# Altium PCB УШЯИ.467444.130.PcbDoc (part 3 of 4)
Units mm, origin at the board's own origin, x right, y up, seen from the top; angles counter-clockwise.
Board outline 280 x 190 mm, 6 copper layers (Top, GND, INT1, INT2, POWER, Bottom), stack 1.422 mm thick; 223 components, 176 nets, 1081 pads, 326 vias.
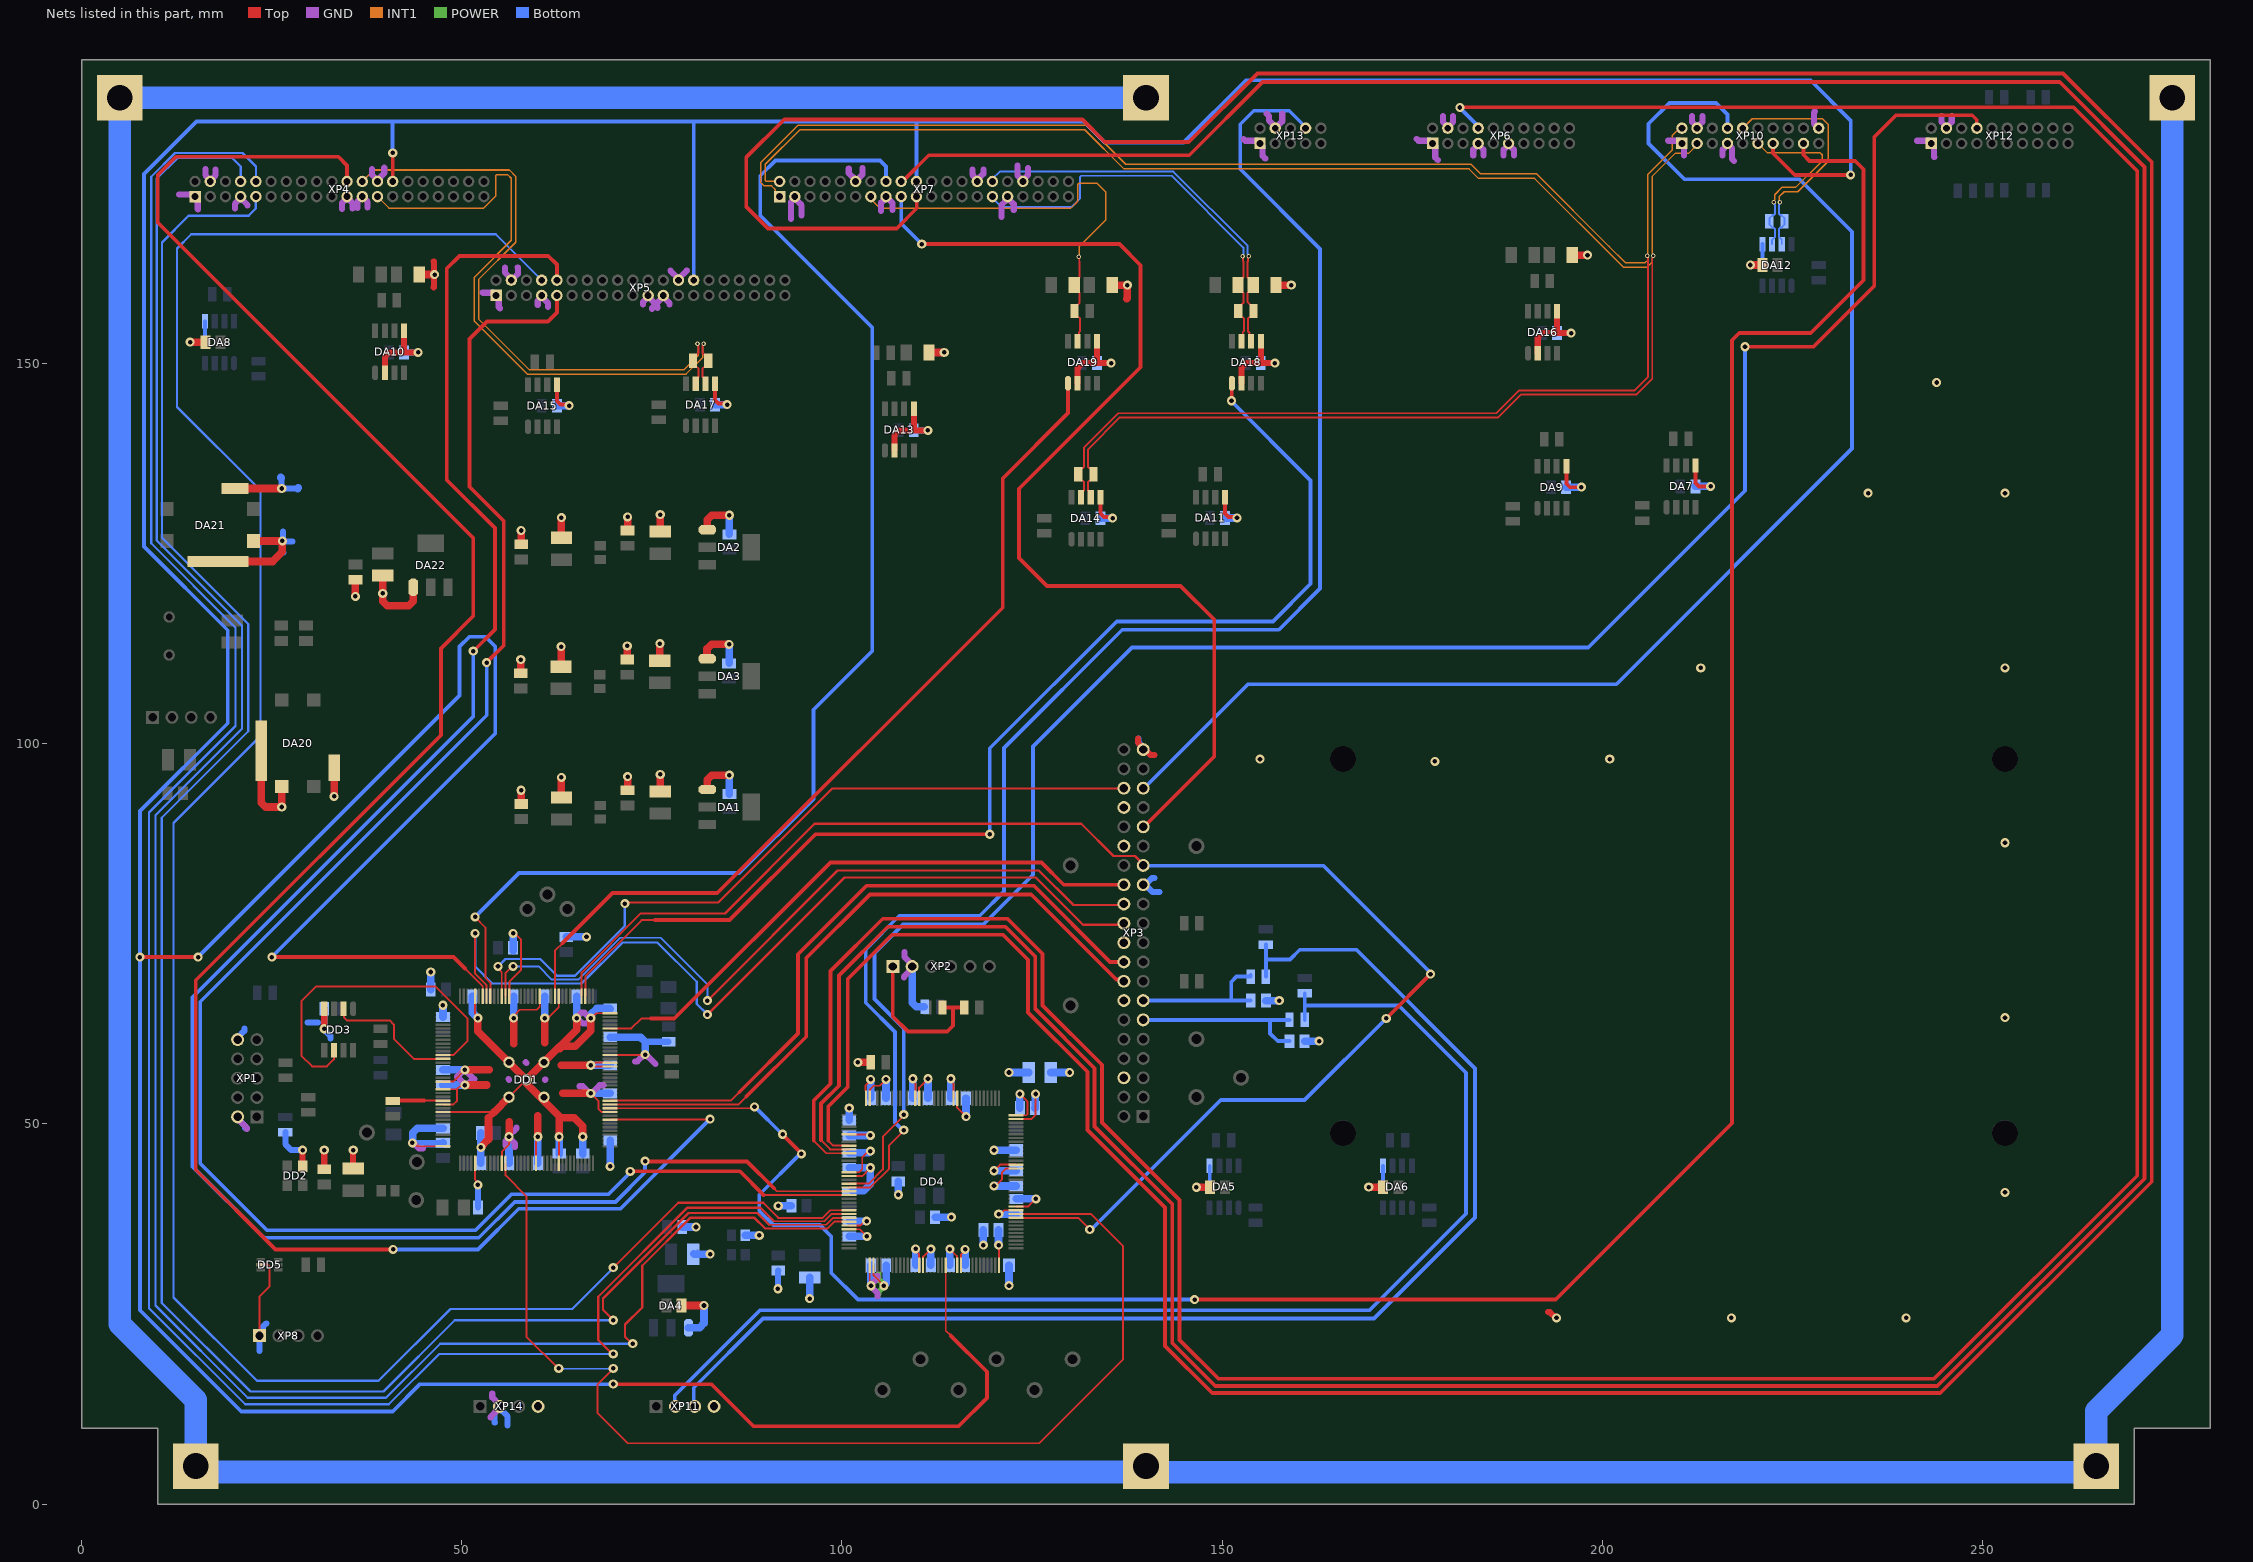
[diagram p7: the nets of this part, all layers, seen from the top]

## Via types
v1: diameter 1.2, hole 0.6, Top to Bottom, tented both sides, 284 vias
v2: diameter 0.6, hole 0.3, Top to Bottom, tented both sides, 42 vias

## Nets (pads, with @x,y where several pads share a name; then routed paths per layer and width w, separated by ;. In a path a pad name is that pad's centre, name@x,y a point inside that pad or via, vN(x,y) a via of type N, cw(c..) or ccw(c..) an arc to the next point about the centre after c; other vN are vias at no path point) (continued)
DAT_ADC4: DA18.1 DD1.111 | length 156.9
  Top w0.25: DD1.111@66.25,66.813 66.25,69.425 73.65,76.825 75.419,76.825
  Top w0.5: 75.419,76.825 85.2,76.825 96.5,88.125 v1(119.45,88.125) ; v1(151.25,145.15) 151.272,145.173 151.272,147.427 DA18.1@151.295,147.45
  Bottom w0.5: v1(119.45,88.125) 119.45,99.425 136.15,116.125 156.7,116.125 161.65,121.075 161.65,134.65 v1@151.029,145.271
DAT_ADC4_n: DA18.7 R43.2 R44.1 XP7.29 | length 54.8
  Top w0.25: DA18.7@152.565,152.95 152.725,153.11 152.725,154.16 152.875,154.31 152.875,155.979 152.729,156.125 152.575,156.125 152.15,156.55 R44.1@152.15,156.95 152.15,157.35 152.825,158.025 152.825,158.525 152.825,159.325 152.1,160.05 R43.2@152.1,160.35 152.1,160.65 152.825,161.375 152.825,161.987 152.825,163.45 152.767,163.508 152.767,164.083 v2(152.7,164.15)
  Bottom w0.25: XP7.29@119.8,172 119.8,171.825 120.975,170.65 130.2,170.65 131.325,171.775 131.325,174.604 131.471,174.75 143.372,174.75 152.825,165.297 152.825,164.471 152.767,164.413 152.767,164.217 v2(152.7,164.15)
DAT_ADC4_p: DA18.6 R44.2 R48.1 XP7.30 | length 52.5
  Top w0.25: v2(153.5,164.15) 153.433,164.083 153.433,163.508 153.375,163.45 153.375,162.215 153.375,161.375 154.1,160.65 R48.1@154.1,160.35 154.1,160.05 153.375,159.325 153.375,158.753 153.375,158.125 154.15,157.35 R44.2@154.15,156.95 154.15,156.55 153.725,156.125 153.571,156.125 153.425,155.979 153.425,154.538 153.425,154.275 153.602,154.098 153.602,153.183 DA18.6@153.835,152.95
  Bottom w0.25: XP7.30@119.8,174 119.8,174.325 120.775,175.3 128.208,175.3 143.6,175.3 153.375,165.525 153.375,164.471 153.433,164.413 153.433,164.217 v2(153.5,164.15)
DAT_DDAC_n: DA14.7 R39.1 XP7.1 XP10.2 | length 253.4
  Top w0.25: DA14.7@131.465,132.45 131.465,133 131.825,133.36 131.825,133.9 131.825,134.479 131.679,134.625 131.525,134.625 131.1,135.05 R39.1@131.1,135.45 131.1,135.85 131.525,136.275 131.679,136.275 131.825,136.421 131.825,138.978 136.347,143.5 186.1,143.5 189.1,146.5 204.272,146.5 206.05,148.278 206.05,163.904 205.992,163.962 205.992,164.158 v2(205.925,164.225)
  INT1 w0.2: XP7.1@91.8,172 91.217,172.583 91.217,172.933 90.75,173.4 89.794,173.4 89.325,173.869 89.325,176.5 89.676,176.851 93.874,181.049 94.225,181.4 132.193,181.4 137.343,176.25 182.753,176.25 184.003,175 191.375,175 191.551,174.824 200.926,165.449 203.075,163.3 205.651,163.3 206.025,163.674 206.025,163.908 206.002,163.931 206.002,164.148 v2(205.925,164.225) 206.002,164.302 206.002,164.519 206.025,164.542 206.025,174.949 209.225,178.149 209.225,180.025 210.2,181 XP10.2@210.5,181
DAT_DDAC_p: DA14.6 R39.2 XP7.2 XP10.3 | length 251.1
  Top w0.25: DA14.6@132.735,132.45 132.735,133 132.375,133.36 132.375,134.127 132.375,134.479 132.521,134.625 132.675,134.625 133.1,135.05 R39.2@133.1,135.45 133.1,135.85 132.675,136.275 132.521,136.275 132.375,136.421 132.375,138.75 136.575,142.95 186.328,142.95 189.328,145.95 204.5,145.95 206.6,148.05 206.6,163.904 206.658,163.962 206.658,164.158 v2(206.725,164.225)
  INT1 w0.2: XP7.2@91.8,174 90.042,174 89.925,174.117 89.925,176.251 94.474,180.8 131.944,180.8 137.094,175.65 182.504,175.65 183.754,174.4 191.126,174.4 202.826,162.7 205.9,162.7 206.625,163.425 206.625,163.908 206.648,163.931 206.648,164.148 v2(206.725,164.225) 206.648,164.302 206.648,164.519 206.625,164.542 206.625,174.701 209.599,177.675 211.35,177.675 212.5,178.825 XP10.3@212.5,179
DAT_F0: DD1.84 XP3.16 | length 89.8
  Top w0.25: DD1.84@69.488,52.575 86.4,52.575 87.4,53.575
  Top w0.5: 87.4,53.575 95.3,61.475 95.3,71.825 103.675,80.2 124.9,80.2 136.092,69.008 136.86,69.008 XP3.16@137.09,68.778
DAT_F1: DD1.85 XP3.18 | length 89.6
  Top w0.25: DD1.85@69.488,53.075 85.375,53.075 86.484,54.184
  Top w0.5: 86.484,54.184 94.2,61.9 94.2,72.325 103.225,81.35 125.25,81.35 135.282,71.318 XP3.18@137.09,71.318
DAT_F2: DD1.137 XP3.22 | length 117.6
  Top w0.25: v1@51.75,75.247 v1(51.75,75.075) 51.75,69.775 53.25,68.275 DD1.137@53.25,66.813
  Top w0.3: v1(82.3,64.4) 100.325,82.425 125.5,82.425 131.7,76.225 XP3.22@137.09,76.225
  Bottom w0.3: v1(51.75,75.075) 51.75,70.704 53.979,68.475 65.75,68.475 71.156,73.881 75.719,73.881 80.9,68.7 80.9,65.8 v1(82.3,64.4)
DAT_F3: DD1.132 XP3.24 | length 101.6
  Top w0.25: DD1.132@55.75,66.813 55.75,69.875 56.6,70.725 v1(56.75,70.725)
  Top w0.3: v1(82.3,66.225) 99.425,83.35 125.9,83.35 130.45,78.8 XP3.24@137.275,78.8
  Bottom w0.25: v1(56.75,70.725) 60.084,70.725 61.809,69 65.337,69 70.837,74.5 76.181,74.5 82.3,68.381 v1(82.3,66.225)
DAT_RG: DD1.49 DD4.82 | length 149
  Top w0.25: DD1.49@55.75,44.837 55.75,43.25 58.5,40.5 58.5,22.025 62.675,17.85 v1(62.75,17.85) ; v1@69.647,17.547 67.825,15.725 67.825,12.025 71.85,8 125.944,8 137,19.056 137,33.932 132.782,38.15 DD4.82@122.9,38.15
  Bottom w0.25: 63.35,17.8 v1@69.963,17.8
  other v1: 69.914,17.85
DATAO: DD1.13 DD3.2 | length 17.5
  Top w0.25: DD3.2@34.435,65.175 34.499,65.111 34.499,63.996 34.87,63.625 40.5,63.625 41.05,63.075 41.05,61.225 43.7,58.575 45.95,58.575 DD1.13@47.512,58.575
DCLK: DD1.12 DD3.6 | length 44.6
  Top w0.25: DD3.6@33.165,59.375 33.165,58.49 32.25,57.575 30.31,57.575 28.9,58.985 28.9,66.175 30.825,68.1 46.525,68.1 50.75,63.875 50.75,60.975 48.85,59.075 DD1.12@47.512,59.075
DVCST: C45.2 C46.2 C47.2 C48.2 C49.2 C50.2 C51.2 C52.2 C53.2 C54.2 C55.2 C56.2 C62.+ C95.2 DD4.6 DD4.17 DD4.30 DD4.39 DD4.52 DD4.62 DD4.72 DD4.84 DD4.95 DD4.108 DD4.121 DD4.131 DD4.144 L10.2 R12.1 R13.1 R14.1 XP2.1 | length 103.8
  Top w0.25: DD4.30@100.924,36.65 102.446,36.65 103.021,37.225 v1(103.25,37.225) ; DD4.17@100.924,43.15 102.65,43.15 v1(103.75,44.25) ; DD4.6@100.924,48.65 100.949,48.625 103.625,48.625 v1(103.75,48.5) ; DD4.144@103.162,53.388 103.137,53.413 103.137,54.386 103.125,54.398 103.125,55.072 103.775,55.722 v1(103.775,55.875) ; DD4.39@104.162,31.412 104.162,30.088 v1@105.703,28.547 ; v1(109.325,55.95) 109.325,55.693 109.662,55.356 DD4.131@109.662,53.388 ; DD4.52@110.662,31.412 110.687,31.437 110.687,32.547 111.001,32.861 111.011,32.861 v1(111.7,33.55) ; v1(114.325,55.95) 114.325,55.693 114.662,55.356 DD4.121@114.662,53.388 ; DD4.62@115.662,31.412 115.662,32.787 116.2,33.325 v1(116.2,33.5) ; v1(120,43.85) 120.8,44.65 DD4.95@122.9,44.65 ; v1(120.6,34.075) 120.637,34.038 120.637,31.437 DD4.72@120.662,31.412 ; DD4.84@122.9,39.15 124.525,39.15 v1(125.525,40.15) ; DD4.108@122.9,51.15 124.279,51.15 124.425,51.296 124.425,52.925 v1(123.4,53.95)
  Top w0.5: XP2.1@106.695,70.725 106.695,64.13 108.675,62.15 113.85,62.15 114.625,62.925 114.625,65.325 ; R13.1@113.225,65.325 114.625,65.325 ; R12.1@115.6,65.325 114.625,65.325
  POWER w0.8: 104.81,27.639 104.81,27.901 105.525,28.617 v1(105.525,28.725) 105.525,28.833 104.81,29.549 104.81,30.18
  Bottom w1: L10.2@87.275,35.35 v1(89.125,35.35) ; C55.2@100.95,37.225 v1(103.25,37.225) ; C56.2@100.95,44.225 100.963,44.237 103.737,44.237 v1(103.75,44.25) 103.75,42.1 102.875,41.225 R14.1@101.4,41.225 ; C95.2@100.95,48.475 100.963,48.487 103.737,48.487 v1(103.75,48.5) ; v1(103.775,55.875) 103.788,55.862 103.788,53.387 C45.2@103.8,53.375 ; v1(105.525,28.725) 105.825,29.025 C54.2@105.825,31.425 ; C46.2@109.325,53.375 v1(109.325,55.95) ; C53.2@111.7,31.425 v1(111.7,33.55) ; C47.2@114.325,53.375 v1(114.325,55.95) ; C52.2@116.2,31.425 v1(116.2,33.5) ; v1(120,43.85) 120.012,43.838 122.913,43.838 C49.2@122.925,43.825 ; v1(120.6,34.075) C51.2@120.6,36.05 ; v1(121.975,56.775) C62.+@124.575,56.775 ; C50.2@122.925,40.15 v1(125.525,40.15) ; C48.2@123.4,52.1 v1(123.4,53.95)
EA: R51.2 R53.2 XP11.2 | length 162.3
  Bottom w0.5: XP11.2@78,12.91 78,14.282 89.218,25.5 169.4,25.5 182.1,38.2 182.1,56.75 173.25,65.6 160.875,65.6 ; R53.2@160.875,63.696 160.875,65.6 ; R51.2@160.875,67.2 160.875,65.6
EB: R52.2 R54.2 XP11.3 | length 173.5
  Bottom w0.5: XP11.3@80.5,12.23 80.5,15.3 89.6,24.4 149.548,24.4 149.642,24.4 169.997,24.4 183.3,37.703 183.3,57.3 167.675,72.925 160.225,72.925 158.925,71.625 155.775,71.625 ; R54.2@155.775,69.4 155.775,71.625 ; R52.2@155.775,73.6 155.775,71.625
EIMP: DD1.83 XP10.17 | length 331.4
  Top w0.25: DD1.83@69.488,52.075 88.325,52.075 v1(88.5,52.25)
  Top w0.5: v1(92.2,48.65) 92.2,48.6 94.675,46.125 v1(94.675,46.075) ; v1(146.4,26.9) 193.899,26.9 217.1,50.101 217.1,153.1 218.05,154.05 227.45,154.05 234.4,161 234.4,175.6 233.3,176.7 227.3,176.7 226.5,177.5 XP10.17@226.5,179
  Bottom w0.5: v1(88.5,52.25) 88.55,52.25 92.15,48.65 v1(92.2,48.65) ; v1(94.675,46.075) 94.5,46.075 89.125,40.7 89.125,38.575 91,36.7 97.1,36.7 98.6,35.2 98.6,30.4 102.1,26.9 v1(146.4,26.9)
EMPTY: DD1.104 XP3.26 | length 77.9
  Top w0.25: DD1.104@69.488,62.575 72.3,62.575 73.6,63.875 74.9,63.875
  Top w0.5: 74.9,63.875 77.95,63.875 98.475,84.4 126.25,84.4 129.172,81.478 XP3.26@137.09,81.478
EN_DDA1: XP3.31 XP7.17 | length 142.6
  Top w0.5: v1(110.5,165.75) 136.5,165.75 139.275,162.975 139.275,149.55 123.3,133.575 123.3,124.45 126.975,120.775 144.556,120.775 148.975,116.356 148.975,98.35 XP3.31@139.721,89.096
  Bottom w0.5: XP7.17@107.8,172 107.8,168.45 v1(110.5,165.75)
EN_DDA2: XP3.35 XP10.8 | length 188.4
  Bottom w0.5: XP3.35@139.63,94.178 139.728,94.178 153.4,107.85 153.9,107.85 201.875,107.85 232.875,138.85 232.875,167.375 225.975,174.275 210.825,174.275 206.125,178.975 206.125,181.575 208.875,184.325 214.975,184.325 216.5,182.8 XP10.8@216.5,181
ENB_STM: DD1.112 DD4.81 XP3.27 | length 200.3
  Top w0.25: DD1.112@65.75,66.813 65.75,69.925 73.525,77.7 ; DD4.81@122.9,37.65 131.1,37.65 132.6,36.15 v1(132.6,36.125)
  Top w0.3: 73.525,77.7 84.6,77.7 96.4,89.5 131.475,89.5 135.725,85.25 138.546,85.25 XP3.27@139.721,84.075
  Top w0.5: v1(171.6,63.9) v1(177.425,69.725)
  Bottom w0.5: v1(132.6,36.125) 132.789,36.125 133.139,36.475 133.15,36.475 149.825,53.15 160.85,53.15 v1(171.6,63.9) ; XP3.27@139.63,84.018 139.673,83.975 163.35,83.975 177.425,69.9 v1(177.425,69.725)
END1B: DD4.29 XP4.8 | length 285.3
  Top w0.25: 89.875,36.275 98.125,36.275 99,37.15 DD4.29@100.924,37.15
  Top w0.3: v1(72.475,21.1) 72.4,21.1 71.475,22.025 71.475,23.625 73.725,25.875 73.725,31.35 80.025,37.65 88.5,37.65 89.875,36.275
  Bottom w0.3: XP4.8@20.9,174 20.9,175.975 19.8,177.075 12.575,177.075 9.85,174.35 9.85,126.763 21.075,115.538 21.075,101.998 9.7,90.623 9.7,26.116 21.841,13.975 40.034,13.975 47.159,21.1 v1(72.475,21.1)
END1P: DD4.26 XP5.8 | length 302.9
  Top w0.25: 91.65,37.675 91.675,37.65 97.45,37.65 98.45,38.65 DD4.26@100.924,38.65
  Top w0.3: v1(69.914,31.1) 78.464,39.65 89.65,39.65 91.625,37.675 91.65,37.675
  Bottom w0.3: XP5.8@60.5,161 54.45,167.05 14.4,167.05 12.525,165.175 12.525,144.336 23.5,133.361 23.5,101.039 12.075,89.614 12.075,27.186 23.036,16.225 39.039,16.225 48.489,25.675 64.525,25.675 69.914,31.064 v1(69.914,31.1)
END2B: DD4.28 XP4.9 | length 274.8
  Top w0.25: 90.4,36.75 97.95,36.75 98.85,37.65 DD4.28@100.924,37.65
  Top w0.3: v1@70.033,24.092 68.575,25.55 68.575,27.05 79.825,38.3 88.85,38.3 90.4,36.75
  Bottom w0.3: XP4.9@22.9,172 22.9,170.45 21.95,169.5 14.075,169.5 10.55,165.975 10.55,127.129 21.9,115.779 21.9,101.656 10.525,90.281 10.525,26.458 22.183,14.8 39.692,14.8 49.067,24.175 v1(69.914,24.175) ; v1@69.722,24.003 v1@70.021,23.704
END2P: DD4.22 XP5.9 | length 235.6
  Top w0.25: 89.693,40.65 DD4.22@100.924,40.65
  Top w0.5: v1(53.25,110.7) 55.5,112.95 55.5,129.325 51,133.825 51,153.25 53.31,155.56 61.31,155.56 62.5,156.75 XP5.9@62.5,159 ; v1(72.15,43.775) 86.568,43.775 89.693,40.65
  Bottom w0.5: v1(53.25,110.7) 53.275,110.675 53.275,103.775 15.575,66.075 15.575,44.825 24.375,36.025 51.811,36.025 56.536,40.75 69.299,40.75 72.15,43.601 v1(72.15,43.775)
ENDU: DD4.9 XP7.19 | length 618.6
  Top w0.25: 98.2,47.825 98.875,47.15 DD4.9@100.924,47.15
  Top w0.5: 98.2,47.825 98.2,52.298 100.757,54.855 100.757,69.057 106.6,74.9 121.203,74.9 124.493,71.61 124.493,64.682 132.293,56.882 132.293,49.207 142.493,39.007 142.493,20.81 148.71,14.593 244.49,14.593 272.307,42.41 272.307,176.536 260.644,188.2 154.65,188.2 145.625,179.175 134.575,179.175 131.625,182.125 92.4,182.125 87.4,177.125 87.4,170.7 90.275,167.825 107.2,167.825 109.852,170.477 109.852,171.948 XP7.19@109.8,172
ENRGB: DD4.27 XP4.10 | length 292.8
  Top w0.25: 91.05,37.225 91.075,37.2 97.675,37.2 98.625,38.15 DD4.27@100.924,38.15
  Top w0.3: v1@69.775,19.75 67.95,21.575 67.95,27.272 79.678,39 89.25,39 91.025,37.225 91.05,37.225
  Bottom w0.3: XP4.10@22.925,173.95 22.925,175.975 21.15,177.75 12.25,177.75 9.125,174.625 9.125,126.398 20.225,115.298 20.225,102.35 8.85,90.975 8.85,25.764 21.489,13.125 40.386,13.125 47.011,19.75 v1@70.394,19.75
  other v1: 69.914,19.75
ENRGF: DD4.10 XP7.18 | length 563.4
  Top w0.25: 97.25,47.85 98.45,46.65 DD4.10@100.924,46.65
  Top w0.5: 97.25,47.85 97.25,52.692 99.6,55.042 99.6,69.525 106.025,75.95 121.496,75.95 125.443,72.004 125.443,65.132 133.243,57.332 133.243,49.682 143.443,39.482 143.443,21.204 149.104,15.543 244.096,15.543 271.357,42.804 271.357,175.918 260.2,187.075 155.325,187.075 145.7,177.45 111.425,177.45 XP7.18@107.888,173.912
ENRGI: DD4.11 XP6.8 | length 487
  Top w0.25: 96.293,47.807 97.95,46.15 DD4.11@100.924,46.15
  Top w0.5: 96.293,47.807 96.293,53.088 98.5,55.295 98.5,70.125 105.375,77 121.8,77 126.4,72.4 126.4,65.6 134.2,57.8 134.2,50.2 144.4,40 144.4,21.6 149.5,16.5 243.7,16.5 270.4,43.2 270.4,175.35 262,183.75 181.325,183.75 v1(181.3,183.725)
  Bottom w0.5: v1@181.3,183.675 183.277,181.698 183.277,181.694 183.7,181.271 XP6.8@183.7,181
ENRGK: DD4.19 XP12.8 | length 261
  Top w0.25: DD4.19@100.924,42.15 103.525,42.15 105.4,44.025 105.4,48.35 108.125,51.075 v1(108.125,51.225)
  Top w0.5: v1(218.8,152.25) 227.825,152.25 235.8,160.225 235.8,179.85 238.65,182.7 248.7,182.7 249.289,182.111 249.289,181.011 XP12.8@249.3,181
  Bottom w0.5: v1(108.125,51.225) 108.125,62.576 104.275,66.426 104.275,72.5 108.025,76.25 118.6,76.25 125.15,82.8 125.15,99.675 138.15,112.675 198.175,112.675 218.8,133.3 v1(218.8,152.25)
ENRGP: DD4.21 XP5.10 | length 251.8
  Top w0.25: 91.05,41.549 91.449,41.15 DD4.21@100.924,41.15
  Top w0.5: v1(51.5,112.2) 54.35,115.05 54.35,128.4 48,134.75 48,162.503 49.676,164.179 61.371,164.179 62.5,163.05 XP5.10@62.5,161 ; v1(74.1,45.125) 74.15,45.075 87.524,45.075 91.05,41.549
  Bottom w0.5: v1(51.5,112.2) 51.5,103.6 14.575,66.675 14.575,44.411 23.961,35.025 52.225,35.025 56.95,39.75 70.2,39.75 74.1,43.65 v1(74.1,45.125)
ENRGV: DD4.20 XP13.8 | length 204.5
  Top w0.25: DD4.20@100.924,41.65 103.732,41.65 106.2,44.118 106.2,47.175 108.125,49.1 v1(108.125,49.2)
  Bottom w0.5: v1(108.125,49.2) 107.988,49.2 106.975,50.213 106.975,62.1 103.125,65.95 103.125,72.976 107.549,77.4 118.124,77.4 121.3,80.576 121.3,99.45 136.875,115.025 157.475,115.025 162.9,120.45 162.9,165.125 152.4,175.625 152.4,181.525 154.175,183.3 158.85,183.3 XP13.8@161.15,181
ENS: DD1.136 XP7.16 | length 173.1
  Top w0.25: v1@51.738,77.212 53.1,75.85 53.1,69.225 53.75,68.575 DD1.136@53.75,66.813
  Bottom w0.5: v1(51.75,77.25) 57.5,83 86.5,83 96.25,92.75 96.25,104.5 104,112.25 104,154.75 89.25,169.5 89.25,174.75 91.25,176.75 105,176.75 105.8,175.95 XP7.16@105.8,174
F_CLK: DD1.24 R2.2 | length 6.6
  Top w0.25: 45,53.075 DD1.24@47.512,53.075
  Top w0.3: R2.2@40.9,53.025 R2.2@40.95,53.075
  Top w0.5: R2.2@40.95,53.075 45,53.075
FULL: DD1.133 XP3.36 | length 99.5
  Top w0.25: v1(54.75,70.725) 54.75,70.468 55.25,69.968 DD1.133@55.25,66.813
  Top w0.3: v1(71.446,79) 71.571,79.125 83.725,79.125 98.725,94.125 XP3.36@136.904,94.125
  Bottom w0.3: v1(54.75,70.725) 55.725,71.7 60.3,71.7 62.5,69.5 64.875,69.5 71.446,76.071 v1(71.446,79)
GND: C1.1 C2.- C3.1 C4.1 C5.1 C6.1 C7.1 C8.1 C9.1 C10.1 C11.- C12.1 C14.1 C15.1 C16.- C17.1 C18.1 C19.1 C20.1 C21.1 C22.1 C23.1 C24.1 C25.1 C26.- C27.1 C28.- C29.1 C30.- C31.1 C32.1 C33.1 C34.1 C35.1 C36.1 C37.1 C38.1 C39.1 C40.- C41.1 C42.1 C43.1 C44.1 C45.1 C46.1 C47.1 C48.1 C49.1 C50.1 C51.1 C52.1 C53.1 C54.1 C55.1 C56.1 C57.1 C58.2 C59.- C60.2 C61.2 C62.- C63.1 C64.- C65.1 C66.- C67.- C68.1 C69.1 C70.1 C71.1 C72.1 C73.1 C74.1 C75.1 C76.1 C77.1 C78.1 C79.1 C80.1 C81.1 C90.2 C91.2 C92.1 C93.- C94.1 C95.1 DA1.1 DA2.1 DA3.1 DA4.1 DA5.5 DA6.5 DA7.5 DA8.5 DA9.5 DA10.2 DA10.5 DA11.5 DA12.5 DA13.2 DA13.5 DA14.5 DA15.5 DA16.2 DA16.5 DA17.5 DA18.2 DA18.5 DA19.2 DA19.5 DA20.4 DA21.4 DA22.1 DD1.19 DD1.21 DD1.25 DD1.27 DD1.36 DD1.41 DD1.48 DD1.57 DD1.63 DD1.82 DD1.94 DD1.95 DD1.97 DD1.108 DD1.118 DD1.123 DD1.131 DD1.140 DD1.145 DD2.2 DD3.4 DD4.16 DD4.31 DD4.38 DD4.51 DD4.61 DD4.83 DD4.94 DD4.107 DD4.120 DD4.130 DD4.143 DD5.2 pad.0 R7.2 R10.1 R11.1 R27.2 R34.2 R41.2 R48.2 R49.2 XP1.2 XP1.10 XP2.2 XP3.6 XP3.14 XP3.20 XP3.25 XP3.30 XP3.34 XP3.39 XP4.1 XP4.4 XP4.7 XP4.21 XP4.23 XP4.26 XP5.1 XP5.4 XP5.7 XP5.21 XP5.23 XP5.26 XP6.1 XP6.4 XP6.7 XP6.11 XP7.3 XP7.12 XP7.15 XP7.28 XP7.31 XP7.34 XP8.1 XP10.1 XP10.4 XP10.7 XP10.20 XP11.4 XP12.1 XP12.4 XP13.1 XP13.4 XP14.2 XP14.4 | length 1538.9
  Top w0.25: XP8.1@23.38,22.15 23.38,27.33 24.7,28.65 24.7,31.3 24.5,31.5 DD5.2@23.55,31.5 ; v1(43.5,47.525) 43.671,47.525 44.121,47.075 DD1.36@47.512,47.075 ; DD1.27@47.512,51.575 54.235,51.575 ; DD1.25@47.512,52.575 48.9,52.575 49.35,53.025 49.35,54.557 ; DD1.21@47.512,54.575 49.332,54.575 49.35,54.557 ; DD1.19@47.537,55.55 DD1.19@47.512,55.575 48.85,55.575 v1(50.4,57.125) ; v1@50.75,55.125 v1(50.4,55.125) 49.918,55.125 49.35,54.557 ; DD1.41@51.75,44.837 51.75,42.675 51.918,42.507 51.918,42.439 51.981,42.376 52.049,42.376 52.049,41.6 v1@52.1,41.549 ; DD1.140@51.75,66.813 51.75,64.532 52.1,64.182 v1(52.1,63.925) ; 53.5,50.84 53.993,51.332 ; DD1.48@55.25,44.837 55.275,44.862 55.275,46.339 56.2,47.264 v1(56.2,48.325) v1@56.2,48.525 ; DD1.145@56.193,53.532 DD1.145@58.485,55.825 ; DD1.131@56.25,66.813 56.25,68.725 57.8,70.275 57.8,74.225 56.95,75.075 v1(56.75,75.075) ; v1(56.8,63.925) 56.8,64.182 57.643,65.025 59.85,65.025 60.25,65.425 DD1.123@60.25,66.813 ; DD1.57@59.75,44.837 59.75,48.018 60,48.268 v1(60,48.325) ; v1(60.9,63.925) 61.082,64.107 61.475,64.107 62.75,65.382 DD1.118@62.75,66.813 ; DD1.63@62.75,44.837 62.775,44.862 62.775,48.3 v1(62.8,48.325) ; v1@64.918,64.107 v1(65.1,63.925) ; v1(66.95,54.025) 68,52.975 68,51.953 68.353,51.6 69.463,51.6 DD1.82@69.488,51.575 ; v1(66.95,63.925) 67.029,63.925 67.679,64.575 DD1.108@69.488,64.575 ; DD1.94@69.488,57.575 67.1,57.575 v1(66.95,57.725) 67.207,57.725 67.557,58.075 DD1.95@69.488,58.075 ; DD1.97@69.488,59.075 74.05,59.075 v1(74.1,59.125) ; DD4.31@100.924,36.15 102.35,36.15 v1(103.275,35.225) ; DD4.16@100.924,43.65 102.25,43.65 102.675,44.075 102.675,45.625 102.94,45.89 102.958,45.89 103.493,46.425 v1(103.75,46.425) ; DD4.38@103.662,31.412 103.662,28.988 v1@103.9,28.75 ; DD4.143@103.662,53.388 103.687,53.413 103.687,54.523 104.193,55.028 104.953,55.028 v1(105.8,55.875) ; v1(109.7,33.575) 109.7,33.318 110.162,32.856 DD4.51@110.162,31.412 ; DD4.130@110.162,53.388 110.162,54.787 v1(111.325,55.95) ; v1(114.2,33.55) 115.137,32.613 115.137,31.437 DD4.61@115.162,31.412 ; DD4.120@115.162,53.388 115.162,52.138 v1(116.325,50.975) ; v1(120,41.85) 120.225,41.85 121.05,42.675 121.05,43.6 121.575,44.125 122.875,44.125 DD4.94@122.9,44.15 ; v1(120.625,38.15) 120.882,38.15 121.382,38.65 DD4.83@122.9,38.65 ; DD4.107@122.9,50.65 124.925,50.65 125.475,51.2 v1(125.475,53.95)
  Top w0.5: DA15.5@62.505,147.25 62.505,145.095 62.966,144.634 63.966,144.634 v1(64.1,144.5) ; DA17.5@83.305,147.384 83.305,145.229 83.766,144.768 84.766,144.768 v1(84.9,144.634) ; DA14.5@134.005,132.45 134.005,130.295 134.466,129.834 135.466,129.834 v1(135.6,129.7) ; DA11.5@150.38,132.475 150.38,130.32 150.841,129.859 151.841,129.859 v1(151.975,129.725) ; DA9.5@195.299,136.525 195.299,134.225 195.748,133.775 v1(197.275,133.775) ; DA7.5@212.299,136.625 212.299,134.325 212.748,133.875 v1(214.275,133.875)
  Top w0.8: v1(29.05,46.575) 29.062,46.563 29.062,44.437 DD2.2@29.075,44.425 ; v1(31.895,46.575) 31.897,46.573 31.897,44.051 C1.1@31.899,44.049 ; v1(31.895,62.531) DD3.4@31.895,65.175 ; C2.-@35.705,44.125 v1(35.705,46.563) ; DA10.2@39.865,148.85 39.865,150.915 40.45,151.5 42.35,151.5 ; DA10.5@42.405,154.35 42.405,151.555 42.35,151.5 ; v1(44.25,151.5) 42.35,151.5 ; 46.3,160.075 46.35,160.125 46.35,161.695 v1(46.405,161.75) 46.35,161.805 46.35,163.425 46.3,163.475 ; v1@63.992,144.5 v1(64.1,144.5) ; v1@84.792,144.634 v1(84.9,144.634) ; DA13.2@106.915,138.597 106.915,140.662 107.5,141.247 109.4,141.247 ; DA13.5@109.455,144.097 109.455,141.302 109.4,141.247 ; v1(111.3,141.247) 109.4,141.247 ; DA19.2@131.015,147.45 131.015,149.515 131.6,150.1 133.5,150.1 ; DA19.5@133.555,152.95 133.555,150.155 133.5,150.1 ; v1(135.4,150.1) 133.5,150.1 ; 138.95,100.7 138.95,100.182 139.63,99.502 XP3.39@139.63,99.258 139.874,99.258 140.607,98.525 141.1,98.525 ; DA18.2@152.565,147.45 152.565,149.515 153.15,150.1 155.05,150.1 ; DA18.5@155.105,152.95 155.105,150.155 155.05,150.1 ; v1(156.95,150.1) 155.05,150.1 ; DA16.2@191.54,151.4 191.54,153.465 192.125,154.05 194.025,154.05 ; 192.875,25.25 193.142,25.25 193.892,24.5 v1(194,24.5) ; DA16.5@194.08,156.9 194.08,154.105 194.025,154.05 ; v1(195.925,154.05) 194.025,154.05
  Top w1: v1(14.25,152.85) C69.1@16.25,152.85 ; DA21.4@17.903,124 25.1,124 26.362,125.262 26.362,126.662 v1(26.4,126.7) DA21.4@22.603,126.7 ; DA21.4@20.153,133.6 v1(26.3,133.6) ; DA20.4@23.6,99.1 23.6,92.286 24.186,91.7 v1(26.3,91.7) 26.3,93.775 DA20.4@26.25,93.825 ; v1(33.2,93.1) DA20.4@33.2,96.5 ; v1(36,119.414) C92.1@36,121.6 ; C93.-@39.6,122.15 v1(39.6,119.8) 39.6,118.786 40.186,118.2 43.014,118.2 43.6,118.786 DA22.1@43.6,120.6 ; R27.2@44.4,161.75 v1(46.405,161.75) ; v1(50.4,57.125) 53.618,57.125 ; v1@50.75,55.125 53.3,55.125 ; v1(52.1,63.925) 52.1,62.21 DD1.145@58.485,55.825 ; v1(52.5,46.913) 52.5,46.967 53.5,47.967 53.5,50.84 ; 53.993,51.332 54.235,51.575 DD1.145@56.193,53.532 ; v1(56.2,48.325) 56.238,48.363 56.238,50.263 ; 56.8,60.575 v1(56.8,63.925) ; C29.1@57.75,109.3 v1(57.75,111.1) ; C39.1@57.8,92.1 v1(57.8,93.9) ; C15.1@57.8,126.275 v1(57.8,128.075) ; v1(60,48.325) 60,51.075 ; 60.9,60.675 v1(60.9,63.925) ; v1(62.8,48.325) 62.8,51.025 ; 62.9,59.889 63.25,60.239 64.914,60.239 66.95,62.275 v1(66.95,63.925) ; C30.-@63.05,110.15 v1(63.05,112.8) ; 63.082,57.725 v1(66.95,57.725) ; C40.-@63.1,92.95 v1(63.1,95.6) ; C16.-@63.1,127.125 v1(63.1,129.775) ; 63.25,54.025 v1(66.95,54.025) ; v1(65.1,63.925) 65.1,62.425 DD1.145@60.8,58.125 DD1.145@58.5,55.825 58.25,55.575 62.8,51.025 ; v1(65.9,48.325) 65.9,49.725 64.785,50.84 62.985,50.84 62.8,51.025 ; C27.1@71.75,111.1 v1(71.75,112.9) ; C25.1@71.8,93.9 v1(71.8,95.7) ; C10.1@71.8,128.075 v1(71.8,129.875) ; C28.-@76.05,110.95 v1(76.05,113.2) ; C26.-@76.1,93.75 v1(76.1,96) ; C11.-@76.1,127.925 v1(76.1,130.175) ; C58.2@78.9,26.125 v1(81.85,26.125) ; DA3.1@82.25,111.2 82.25,112.5 82.85,113.1 v1(85.15,113.1) ; DA1.1@82.3,94 82.3,95.3 82.9,95.9 v1(85.2,95.9) ; DA2.1@82.3,128.175 82.3,129.475 82.9,130.075 v1(85.2,130.075) ; v1(102.1,58.1) R10.1@103.775,58.1 ; R34.2@111.45,151.497 v1(113.455,151.497) ; R49.2@135.55,160.35 v1(137.555,160.35) 137.517,160.312 137.517,158.617 137.475,158.575 ; v1(146.625,41.675) 148.375,41.675 C65.1@148.4,41.7 ; R48.2@157.1,160.35 v1(159.105,160.35) ; v1(169.3,41.7) 171.05,41.7 171.2,41.85 C68.1@171.2,42.1 ; R41.2@196.075,164.3 v1(198.08,164.3) ; v1(219.5,163) C74.1@221.095,163
  GND w0.8: 12.8,172.283 14.617,172.283 XP4.1@14.9,172 15.25,171.65 15.25,170.35 15.3,170.3 ; 16.25,175.603 16.25,174.819 XP4.4@16.9,174.169 ; XP4.4@16.9,174.119 17.6,174.819 17.6,175.568 ; 20.142,170.432 20.142,171.052 XP4.7@20.9,171.811 ; XP1.2@20.5,50.941 20.5,50.697 21.7,49.497 21.7,49.325 ; XP4.7@20.9,172 XP4.7@20.9,171.811 ; 21.8,170.84 21.8,170.911 XP4.7@20.9,171.811 ; 34.25,170.397 34.25,171.181 XP4.21@34.9,171.831 ; XP4.21@34.9,171.881 35.6,171.181 35.6,170.432 ; 36.25,170.522 36.25,171.306 XP4.23@36.9,171.956 ; XP4.23@36.9,172.006 37.6,171.306 37.6,170.557 ; 38.191,175.6 38.2,175.591 38.2,174.842 XP4.26@38.9,174.142 ; XP4.26@38.9,174 XP4.26@38.9,174.142 ; 39.79,175.8 39.79,175.08 38.9,174.189 XP4.26@38.9,174.142 ; v1(43.5,47.525) 43.608,47.525 44.38,46.753 44.9,46.753 ; 49.381,56.214 50.292,57.125 v1(50.4,57.125) 51.632,55.893 ; 49.677,55.956 50.4,55.233 v1(50.4,55.125) 50.508,55.125 50.708,55.325 50.869,55.325 51.164,55.621 ; 52.75,159.4 52.8,159.35 54.15,159.35 XP5.1@54.5,159 54.85,158.65 54.85,157.467 55,157.317 ; 53.805,11.4 53.805,11.466 54.945,12.606 XP14.2@54.945,12.85 54.945,13.094 54,14.039 54,14.525 ; 55.671,162.7 55.671,162.018 56.5,161.189 XP5.4@56.5,161 56.542,161 57.384,161.842 57.384,162.644 57.329,162.7 ; 55.737,47.207 55.737,47.754 v1@56.2,48.217 ; 56.15,55.893 56.218,55.825 ; 56.958,46.967 56.958,47.459 v1@56.2,48.217 ; 57.2,49.525 57.2,49.433 56.2,48.433 v1(56.2,48.325) v1@56.2,48.217 ; 58.4,58.125 58.5,58.025 ; 59.979,157.742 59.979,158.29 XP5.7@60.5,158.811 ; XP5.7@60.5,159 XP5.7@60.5,158.811 ; 60.942,55.825 60.967,55.85 ; 61.356,157.467 61.356,157.955 XP5.7@60.5,158.811 ; 65.5,54.967 65.9,54.967 66.842,54.025 v1(66.95,54.025) 67.058,54.025 68.133,55.1 68.6,55.1 ; 72.8,58.245 73.073,58.245 73.603,58.775 73.642,58.775 73.992,59.125 v1(74.1,59.125) 74.208,59.125 74.558,58.775 74.608,58.775 75.5,57.883 ; 73.813,157.838 73.813,158.123 XP5.21@74.5,158.811 ; XP5.21@74.5,159 XP5.21@74.5,158.811 ; 75,157.2 75,157.338 75.486,157.824 ; 75.74,157.338 75.74,157.571 75.486,157.824 ; XP5.23@76.5,159 XP5.23@76.5,158.838 ; 77.329,157.824 77.329,157.982 76.5,158.811 XP5.23@76.5,158.838 ; 77.42,162.3 77.42,162.27 XP5.26@78.5,161.189 ; XP5.26@78.5,161 XP5.26@78.5,161.189 ; 79.58,162.27 XP5.26@78.5,161.189 ; 93.3,169.08 93.3,171.311 XP7.3@93.8,171.811 ; XP7.3@93.8,172 XP7.3@93.8,171.811 ; 94.684,169.5 94.684,170.816 94.6,170.9 94.6,171.011 XP7.3@93.8,171.811 ; 100.9,175.683 100.9,175.089 101.8,174.189 XP7.12@101.8,174.016 ; XP7.12@101.8,174 XP7.12@101.8,174.016 ; 102.7,175.75 102.684,175.734 102.684,174.9 XP7.12@101.8,174.016 ; 104.7,27.325 104.7,27.742 103.825,28.617 v1(103.825,28.725) 103.825,28.833 104.7,29.708 104.7,30.061 ; 105.113,170.1 105.159,170.147 105.159,171.2 105.8,171.841 XP7.15@105.8,171.982 ; XP7.15@105.8,172 XP7.15@105.8,171.982 ; 106.656,170.25 106.656,171.126 XP7.15@105.8,171.982 ; 108.175,69.275 108.175,69.421 109.235,70.481 XP2.2@109.235,70.725 109.235,70.969 108.225,71.979 108.225,72.625 ; 117.155,175.551 117.155,174.889 117.279,174.766 117.279,174.71 XP7.28@117.8,174.189 ; XP7.28@117.8,174 XP7.28@117.8,174.189 ; 118.6,175.551 118.6,174.989 XP7.28@117.8,174.189 ; 121,169.329 120.971,169.358 120.971,170.882 121.45,171.36 121.45,171.461 XP7.31@121.8,171.811 ; XP7.31@121.8,172 XP7.31@121.8,171.811 ; 122.6,170.25 122.6,171.011 XP7.31@121.8,171.811 ; 123.113,176.1 123.1,176.087 123.1,174.766 XP7.34@123.8,174.066 ; XP7.34@123.8,174 XP7.34@123.8,174.066 ; 124.487,175.734 124.487,174.877 123.8,174.189 XP7.34@123.8,174.066 ; 152.851,179.55 153.051,179.35 154.65,179.35 XP13.1@155,179 155.35,178.65 155.35,177.35 155.7,177 ; 155.89,182.9 156.162,182.629 156.162,182.028 157,181.189 XP13.4@157,181 157.04,181 157.929,181.889 157.929,182.9 ; 175.6,179.6 175.85,179.35 177.35,179.35 XP6.1@177.7,179 178.05,178.65 178.05,177.15 178.4,176.8 ; 179.05,182.603 179.05,181.819 179.7,181.169 XP6.4@179.7,181.119 ; XP6.4@179.7,181 XP6.4@179.7,181.119 ; 180.4,182.568 180.4,181.819 XP6.4@179.7,181.119 ; 183.05,177.397 183.05,178.181 XP6.7@183.7,178.831 ; XP6.7@183.7,178.881 184.4,178.181 184.4,177.432 ; 187.05,177.397 187.05,178.181 XP6.11@187.7,178.831 ; XP6.11@187.7,178.881 188.4,178.181 188.4,177.432 ; 208.7,179.4 208.75,179.35 210.15,179.35 XP10.1@210.5,179 210.783,178.717 210.783,177.397 ; 211.85,182.603 211.85,181.819 XP10.4@212.5,181.169 ; XP10.4@212.5,181.119 213.2,181.819 213.2,182.568 ; 215.85,177.397 215.85,178.181 XP10.7@216.5,178.831 ; XP10.7@216.5,179 216.5,178.955 217.1,178.355 217.1,176.94 217.34,176.7 ; 227.979,183.2 227.855,183.076 227.855,181.6 228.455,181 XP10.20@228.5,181 ; 241.4,179.367 241.417,179.35 242.95,179.35 XP12.1@243.3,179 243.65,178.65 243.65,177.255 243.7,177.205 ; 244.65,182.603 244.65,181.819 XP12.4@245.3,181.169 ; XP12.4@245.3,181.119 246,181.819 246,182.568 ; XP5.21@74.5,158.811 75.486,157.824 ; 75.486,157.824 XP5.23@76.5,158.838 ; v1(65.1,63.925) 65.208,63.925 65.927,63.206 66.339,63.206 66.95,63.817 v1(66.95,63.925) 66.842,63.925 66.107,64.66 65.727,64.66 65.1,64.033 v1(65.1,63.925)
  Bottom w0.25: C59.-@80.431,32.85 80.5,32.919 C59.-@81,33.419
  Bottom w0.5: v1(14.25,152.85) 15.6,152.85 16.226,153.476 DA8.5@16.226,155.6 ; v1(146.625,41.675) 147.9,41.675 148.375,42.15 DA5.5@148.375,44.492 ; v1@169.3,41.65 169.317,41.667 170.242,41.667 171.165,42.59 DA6.5@171.165,44.492 ; v1(219.5,163) 219.634,163.134 220.634,163.134 221.095,163.595 DA12.5@221.095,165.75
  Bottom w0.8: XP1.2@20.5,50.941 20.5,50.697 21.45,49.747 21.45,49.475 ; XP1.10@20.5,61.101 20.5,61.344 21.4,62.244 21.4,62.55 ; XP8.1@23.125,21.895 23.83,22.6 23.83,23.33 24.275,23.775 ; 23.38,20.137 XP8.1@23.38,22.15 ; v1@26.262,133.638 26.262,134.988 ; v1(26.3,133.6) 28.4,133.6 ; 26.45,127.95 26.45,126.75 v1(26.4,126.7) v1@26.475,126.625 ; 26.525,125.2 26.477,125.248 26.477,126.623 v1@26.475,126.625 ; R7.2@26.773,48.925 26.773,47.352 27.55,46.575 v1(29.05,46.575) ; 27.725,126.625 v1@26.475,126.625 ; 29.675,63.35 29.704,63.379 31.046,63.379 ; v1(31.895,62.531) 31.895,62.422 32.7,61.617 32.7,61.225 ; v1@31.9,62.536 C44.1@31.9,65.175 ; C72.1@42.4,151.5 v1(44.25,151.5) ; C19.1@52.1,39.025 v1(52.1,42) v1@52.1,42.185 ; 54.325,10.725 54.275,10.775 54.275,11.936 XP14.2@54.945,12.606 ; XP14.2@54.945,12.85 XP14.2@54.945,12.606 ; 56.025,10.325 56.025,11.526 XP14.2@54.945,12.606 ; 74.1,60.825 C38.1@77.2,60.825 ; v1(91.575,28.329) 91.6,28.354 91.6,30.7 C63.1@91.625,30.725 ; C75.1@109.45,141.247 v1(111.3,141.247) ; C81.1@133.55,150.1 v1(135.4,150.1) ; 139.025,100.7 139.025,100.13 139.655,99.5 XP3.39@139.655,99.256 ; XP3.25@139.655,81.476 XP3.25@139.899,81.476 ; 141.125,82.35 140.773,82.35 XP3.25@139.899,81.476 ; 141.75,80.525 140.85,80.525 XP3.25@139.899,81.476 ; C80.1@155.1,150.1 v1(156.95,150.1) ; C78.1@194.075,154.05 v1(195.925,154.05)
  Bottom w1: 26.2,135.05 26.262,134.988 ; v1@26.262,133.638 v1(26.3,133.6) ; 28.4,133.6 28.5,133.7 ; C4.1@45.9,67.7 v1(45.9,70) ; C8.1@47.512,47.525 47.412,47.425 43.6,47.425 v1(43.5,47.525) 43.538,47.563 43.538,48.839 44.124,49.425 C6.1@47.512,49.425 ; C17.1@47.512,55.125 v1(50.4,55.125) ; C20.1@47.512,57.125 v1(50.4,57.125) ; C35.1@47.512,64.075 v1(47.512,65.625) ; C21.1@51.4,66.825 51.4,64.625 v1(52.1,63.925) ; C34.1@52.5,44.825 v1(52.5,46.913) C18.1@52.5,48.825 ; C31.1@56.2,44.825 v1(56.2,48.325) ; C36.1@56.75,72.825 v1(56.75,75.075) ; v1(56.8,63.925) C22.1@56.8,66.825 ; C41.1@60,44.825 v1(60,48.325) ; v1(60.9,63.925) C23.1@60.9,66.825 ; C77.1@62.505,144.5 v1(64.1,144.5) ; C33.1@62.8,46.025 C33.1@62.8,46.125 v1(62.8,48.325) ; C37.1@63.75,74.625 v1(66.4,74.625) ; v1(65.1,63.925) C9.1@65.1,66.825 ; C5.1@65.9,46.025 C5.1@65.9,46.125 v1(65.9,48.325) ; v1(66.95,54.025) C43.1@69.488,54.025 ; v1(66.95,57.725) C42.1@69.5,57.725 ; v1(66.95,63.925) 66.988,63.963 66.988,64.427 67.782,65.221 69.454,65.221 C7.1@69.5,65.175 ; v1(69.5,44.425) C32.1@69.5,47.825 ; C24.1@69.5,61.425 73.5,61.425 74.1,60.825 v1(74.1,59.125) ; C94.1@79,36.45 v1(80.8,36.45) ; DA4.1@79.806,23.2 81.264,23.2 81.85,23.786 v1(81.85,26.125) ; C59.-@80.5,32.919 80.557,32.862 82.638,32.862 v1(82.65,32.875) ; C79.1@83.305,144.634 v1(84.9,144.634) ; C12.1@85.15,110.6 v1(85.15,113.1) ; C14.1@85.2,93.4 v1(85.2,95.9) ; C3.1@85.2,127.575 v1(85.2,130.075) ; v1(91.625,39.225) C57.1@93.35,39.225 ; v1(95.75,27.025) C64.-@95.75,29.825 ; C55.1@100.95,35.225 v1(103.275,35.225) ; C56.1@100.95,46.225 103.496,46.225 103.696,46.425 v1(103.75,46.425) ; C95.1@100.95,50.475 100.956,50.481 100.956,52.094 v1(100.963,52.1) ; v1(103.825,28.725) C54.1@103.825,31.425 ; C45.1@105.8,53.375 v1(105.8,55.875) ; v1(107.425,40.7) C61.2@107.425,42.45 ; XP2.2@109.235,70.725 109.235,65.94 109.775,65.4 R11.1@110.825,65.4 ; C53.1@109.7,31.425 v1(109.7,33.575) ; C46.1@111.325,53.375 v1(111.325,55.95) ; C60.2@112.25,37.75 v1(114.4,37.75) ; C52.1@114.2,31.425 v1(114.2,33.55) ; v1(116.325,50.975) C47.1@116.325,53.375 ; v1(118.6,34.075) C51.1@118.6,36.05 ; v1(120,41.85) 120.013,41.838 122.913,41.838 C49.1@122.925,41.825 ; v1(120,46.55) C67.-@122.925,46.55 ; v1(120.625,38.15) C50.1@122.925,38.15 ; v1(121.975,28.75) C66.-@121.975,31.425 ; C48.1@125.4,52.1 125.438,52.138 125.438,53.912 v1(125.475,53.95) ; C62.-@127.475,56.775 v1(129.961,56.775) ; C76.1@134.005,129.7 v1(135.6,129.7) ; C73.1@150.38,129.725 v1(151.975,129.725) ; C91.2@155.775,66.236 v1(157.525,66.236) ; C90.2@160.875,60.9 v1(162.775,60.9) ; C70.1@195.275,133.775 v1(197.275,133.775) ; C71.1@212.275,133.875 v1(214.275,133.875)
  Bottom w3: pad.0@140,185 pad.0@5,185 5,23.7 15,13.7 pad.0@15,5 15.8,4.2 139.2,4.2 pad.0@140,5 140.825,4.175 264.175,4.175 pad.0@265,5 265,12.225 275,22.225 pad.0@275,185
  other v1: 217,24.5 240,24.5 253,41 253,64 253,87 178,97.7 155,98 201,98 212.975,110 253,110 235,133 253,133 244,147.55
IMPB+/-V: DD1.80 XP4.22 | length 283.9
  Top w0.25: DD1.80@69.488,50.575 69.513,50.6 82.6,50.6 v1(82.65,50.65)
  Top w0.5: XP4.22@34.9,174 34.9,176.1 33.75,177.25 12.414,177.25 10,174.836 10,168.588 51.5,127.088 51.5,116.813 47.248,112.56 47.248,101.148 15,68.9 15,43.975 25.475,33.5 v1(40.95,33.5)
  Bottom w0.5: v1(40.95,33.5) 52.125,33.5 57.475,38.85 70.85,38.85 v1(82.65,50.65)
IMPB_n: DA17.7 R45.1 XP4.24 | length 82.2
  Top w0.25: DA17.7@80.765,147.384 80.765,147.934 81.125,148.294 81.125,148.834 81.125,149.412 80.979,149.559 80.825,149.559 80.4,149.984 R45.1@80.4,150.384 80.4,150.784 80.825,151.209 80.979,151.209 81.125,151.355 81.125,152.324 81.067,152.382 81.067,152.578 v2(81,152.645)
  INT1 w0.2: XP4.24@36.9,174 38.4,175.5 56.25,175.5 57.1,174.65 57.1,166.001 52.25,161.151 52.25,155.849 58.849,149.25 79.25,149.25 81.1,151.1 81.1,152.328 81.077,152.351 81.077,152.568 v2(81,152.645)
IMPB_p: DA17.6 R45.2 XP4.25 | length 84.6
  Top w0.25: v2(81.8,152.645) 81.733,152.578 81.733,152.382 81.675,152.324 81.675,151.355 81.821,151.209 81.975,151.209 82.4,150.784 R45.2@82.4,150.384 82.4,149.984 81.975,149.559 81.821,149.559 81.675,149.412 81.675,149.061 81.675,148.294 82.035,147.934 DA17.6@82.035,147.384
  INT1 w0.2: XP4.25@38.9,172 40.4,170.5 52.885,170.5 54.45,172.065 54.45,174.783 54.567,174.9 56.001,174.9 56.5,174.401 56.5,166.25 51.65,161.4 51.65,155.6 58.6,148.65 79.499,148.65 81.7,150.851 81.7,152.328 81.723,152.351 81.723,152.568 v2(81.8,152.645)
IMPC_n: DA12.7 R33.1 XP10.10 | length 32.6
  INT1 w0.2: XP10.10@218.5,181 219.75,182.25 229,182.25 229.75,181.5 229.75,176.651 225.749,172.65 223.951,172.65 223.3,171.999 223.3,171.567 223.323,171.544 223.323,171.327 v2(223.4,171.25)
  Bottom w0.25: v2(223.4,171.25) 223.333,171.183 223.333,170.987 223.275,170.929 223.275,169.721 223.421,169.575 223.575,169.575 224,169.15 R33.1@224,168.75 224,168.35 223.575,167.925 223.421,167.925 223.275,167.779 223.275,167.2 223.275,166.66 223.635,166.3 DA12.7@223.635,165.75
IMPC_p: DA12.6 R33.2 XP10.11 | length 25.5
  INT1 w0.2: XP10.11@220.5,179 221.75,177.75 228.7,177.75 228.95,177.5 228.95,176.7 225.5,173.25 223.703,173.25 222.7,172.247 222.7,171.567 222.677,171.544 222.677,171.327 v2(222.6,171.25)
  Bottom w0.25: DA12.6@222.365,165.75 222.365,166.3 222.725,166.66 222.725,167.427 222.725,167.779 222.579,167.925 222.425,167.925 222,168.35 R33.2@222,168.75 222,169.15 222.425,169.575 222.579,169.575 222.725,169.721 222.725,170.929 222.667,170.987 222.667,171.183 v2(222.6,171.25)
KA: C90.1 R53.1 XP3.11 | length 24
  Bottom w0.5: XP3.11@139.655,63.696 156.325,63.696 ; C90.1@158.875,60.9 157.325,60.9 156.325,61.9 156.325,63.696 ; R53.1@158.875,63.696 156.325,63.696
KB: C91.1 R54.1 XP3.13 | length 19.4
  Bottom w0.5: XP3.13@139.655,66.236 151.225,66.236 ; C91.1@153.775,66.236 151.225,66.236 ; R54.1@153.775,69.4 151.925,69.4 151.225,68.7 151.225,66.236
LIMIT: DD1.138 DD4.58 XP4.28 XP5.28 XP7.20 XP10.13 | length 744.1
  Top w0.25: 50.4,70.468 52.75,68.118 DD1.138@52.75,66.813 ; v1@69.914,15.3 70.164,15.55 v1@70.238,15.624 ; v1(69.914,15.8) v1@69.939,15.775 ; DD4.58@113.662,31.412 113.662,22.825 114.302,22.185
  Top w0.5: v1(7.65,71.95) v1(15.3,71.95) ; v1(25,71.95) 25.025,71.975 48.893,71.975 50.4,70.468 ; XP4.28@40.9,174 40.901,174.001 40.901,177.749 v1(40.902,177.75) ; v1@69.939,15.775 82.8,15.775 88.325,10.25 115.375,10.25 119.075,13.95 119.075,17.412 114.302,22.185 ; XP10.13@222.5,179 222.5,177.7 225.35,174.85 v1(232.7,174.85)
  Bottom w0.5: v1(15.3,71.95) 49.7,106.35 49.7,112.8 51,114.1 53.1,114.1 54.4,112.8 54.4,101.35 v1(25,71.95) ; v1(40.902,177.75) 40.875,177.777 40.875,181.9 ; v1@69.889,15.775 44.5,15.775 40.9,12.175 20.975,12.175 7.65,25.5 v1(7.65,71.95) 7.65,91.175 19.2,102.725 19.2,114.95 8.175,125.975 8.175,174.975 15.1,181.9 40.875,181.9 ; XP5.28@80.5,161 80.5,181.875 80.475,181.9 ; XP7.20@109.8,174 109.8,181.9 ; v1@232.7,174.863 232.7,182 227.4,187.3 153.125,187.3 144.95,179.125 134.6,179.125 131.825,181.9 109.8,181.9 ; 40.875,181.9 80.475,181.9 ; 80.475,181.9 109.8,181.9
LINE: DA19.1 DD1.119 | length 116.7
  Top w0.25: DD1.119@62.25,66.813 62.25,72.8 63.25,73.8
  Top w0.5: 63.25,73.8 69.825,80.375 83.6,80.375 121.15,117.925 121.15,134.925 129.745,143.52 DA19.1@129.745,147.45
LINE_n: DA19.7 R46.2 R47.1 XP7.13 | length 57.4
  Top w0.25: DA19.7@131.015,152.95 131.175,153.11 131.175,154.16 131.325,154.31 131.325,155.979 131.179,156.125 131.025,156.125 130.6,156.55 R47.1@130.6,156.95 130.6,157.35 131.275,158.025 131.275,158.525 131.275,159.325 130.55,160.05 R46.2@130.55,160.35 130.55,160.65 131.275,161.375 131.275,161.987 131.275,163.45 131.217,163.508 131.217,164.016 v2(131.15,164.083)
  INT1 w0.2: XP7.13@103.8,172 103.8,171.675 104.975,170.5 130.125,170.5 131.026,171.401 131.026,173.624 131.144,173.741 133.584,173.741 134.675,172.65 134.675,168.89 131.25,165.465 131.25,164.4 131.227,164.377 131.227,164.16 v2(131.15,164.083)